# EAGLE board ihc_mon (EAGLE 7.7.0)
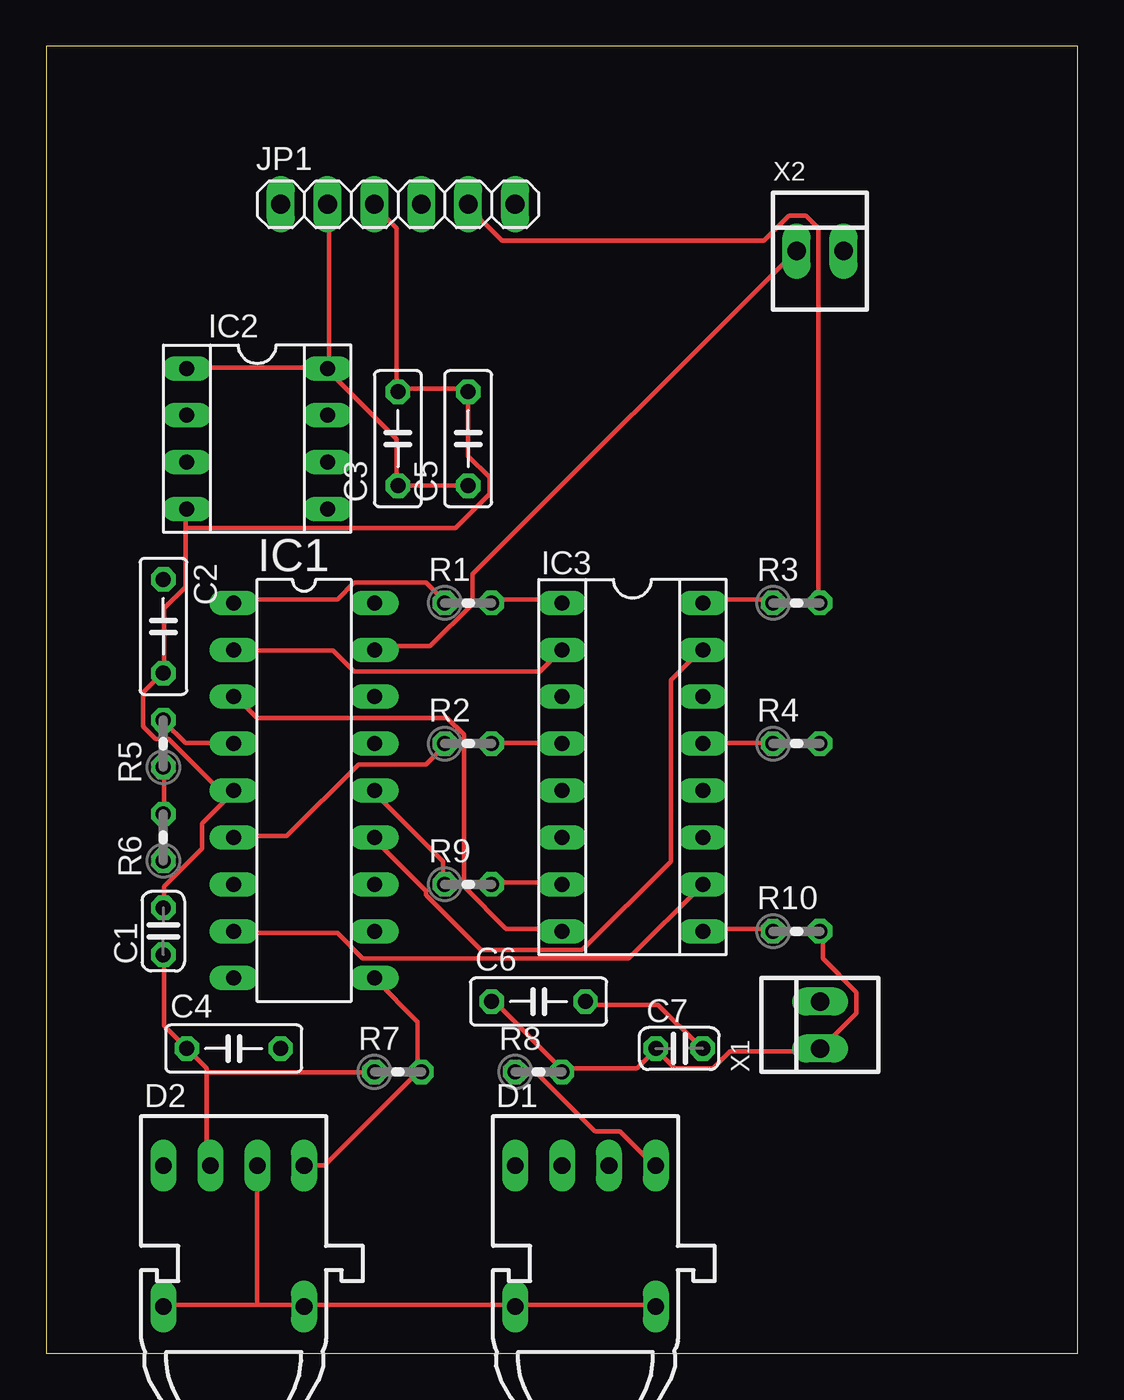
[diagram p0: board, top side]
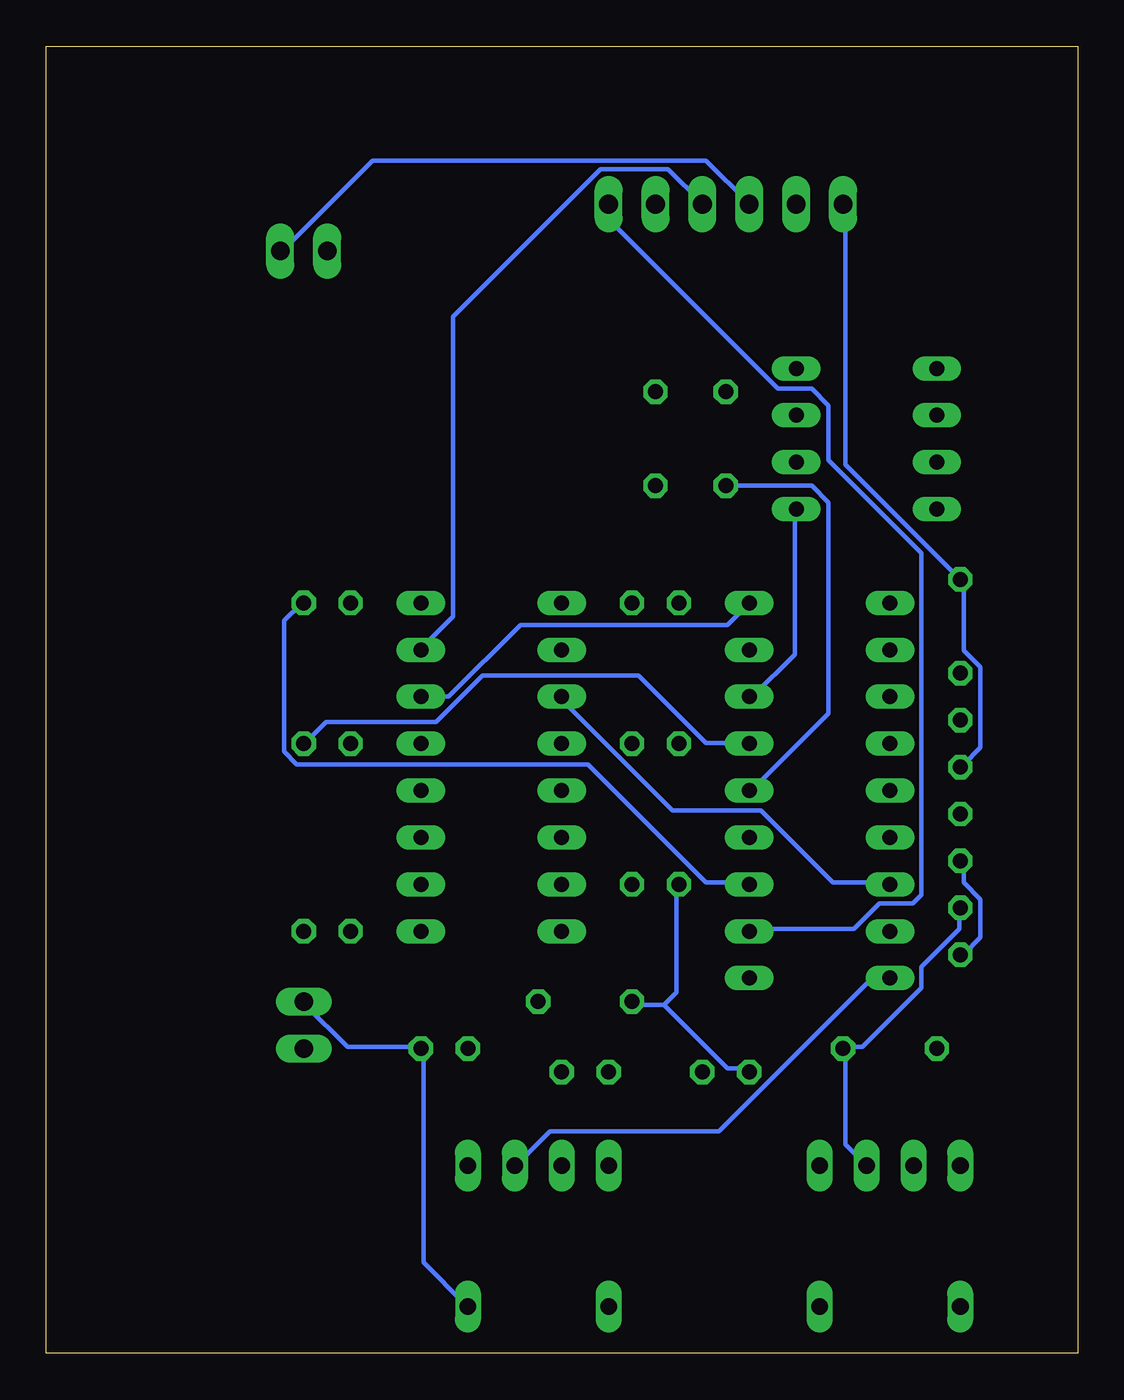
[diagram p1: board, bottom side, seen from below]

Size 55.86 x 70.79 mm. Coordinates in mm from the lower left corner, seen from the top.
Outline: 0,0 55.86,0 55.86,70.79 0,70.79 0,0
Copper layers (1*16): Top 0.035mm / dielectric 1.5mm / Bottom 0.035mm
Design rules "default": minimum track width 10mil, minimum drill 24mil, track to track 8mil, track to pad 8mil, pad to pad 8mil, via to via 8mil, smd to smd 8mil, copper to edge 40mil, drill to drill 8mil, minimum pad ring 10mil, minimum via ring 8mil, stop-mask expansion 4mil, vias tented up to drill 0mil, thermal gap 10mil

## Footprints (pad centres in the part's own frame; a part is rotated, then mirrored left to right if it is on the bottom)
C025-024X044 = drill 0.813 octagon: 1 -1.27,0; 2 1.27,0
C050-025X075 = drill 0.813 octagon: 1 -2.54,0; 2 2.54,0
HFBR25XX = drill 0.9 long: 1 0,3.81; 2 0,1.27; 3 0,-1.27; 4 0,-3.81; 5 7.62,-3.81; 8 7.62,3.81
DIL18 = drill 0.813 long: 1 -10.16,-3.81; 2 -7.62,-3.81; 3 -5.08,-3.81; 4 -2.54,-3.81; 5 0,-3.81; 6 2.54,-3.81; 7 5.08,-3.81; 8 7.62,-3.81; 9 10.16,-3.81; 10 10.16,3.81; 11 7.62,3.81; 12 5.08,3.81; 13 2.54,3.81; 14 0,3.81; 15 -2.54,3.81; 16 -5.08,3.81; 17 -7.62,3.81; 18 -10.16,3.81
SOCKET-08 = drill 0.813 long: 1 -3.81,-3.81; 2 -1.27,-3.81; 3 1.27,-3.81; 4 3.81,-3.81; 5 3.81,3.81; 6 1.27,3.81; 7 -1.27,3.81; 8 -3.81,3.81
SOCKET-16 = drill 0.813 long: 1 -8.89,-3.81; 2 -6.35,-3.81; 3 -3.81,-3.81; 4 -1.27,-3.81; 5 1.27,-3.81; 6 3.81,-3.81; 7 6.35,-3.81; 8 8.89,-3.81; 9 8.89,3.81; 10 6.35,3.81; 11 3.81,3.81; 12 1.27,3.81; 13 -1.27,3.81; 14 -3.81,3.81; 15 -6.35,3.81; 16 -8.89,3.81
1X06 = drill 1.016 long: 1 -6.35,0; 2 -3.81,0; 3 -1.27,0; 4 1.27,0; 5 3.81,0; 6 6.35,0
0204V = drill 0.813 octagon: 1 -1.27,0; 2 1.27,0
22-23-2021 = drill 1 long: 1 -1.27,0; 2 1.27,0

## Placement (x,y rotation side)
C1  22  [C025-024X044]  6.35,22.86 90 top
C2  0.1  [C050-025X075]  6.35,39.37 270 top
C3  0.1  [C050-025X075]  19.05,49.53 90 top
C4  0.1  [C050-025X075]  10.16,16.51 0 top
C5  0.1  [C050-025X075]  22.86,49.53 90 top
C6  0.1  [C050-025X075]  26.67,19.05 0 top
C7  22  [C025-024X044]  34.29,16.51 0 top
D1  HFBR1528  [HFBR25XX]  29.21,10.16 270 top
D2  HFBR2528  [HFBR25XX]  10.16,10.16 270 top
IC1  PIC18F1220P  [DIL18]  13.97,30.48 270 top
IC2  OX-52 10mhz  [SOCKET-08]  11.43,49.53 270 top
IC3  LX2885IGW  [SOCKET-16]  31.75,31.75 270 top
JP1  ICSP  [1X06]  19.05,62.23 0 top
R1  510  [0204V]  22.86,40.64 0 top
R2  510  [0204V]  22.86,33.02 0 top
R3  510  [0204V]  40.64,40.64 0 top
R4  510  [0204V]  40.64,33.02 0 top
R5  510  [0204V]  6.35,33.02 90 top
R6  10000  [0204V]  6.35,27.94 90 top
R7  2200  [0204V]  19.05,15.24 0 top
R8  100  [0204V]  26.67,15.24 0 top
R9  510  [0204V]  22.86,25.4 0 top
R10  510  [0204V]  40.64,22.86 0 top
X1  22-23-2021  [22-23-2021]  41.91,17.78 90 top
X2  22-23-2021  [22-23-2021]  41.91,59.69 0 top

## Library data of the parts
C1-C7 R1-R10 = resistor
D1 = opto-transmittter-hp; MF: AGILENT TECHNOLOGIES; MPN: HFBR-1528; OC_FARNELL: 1247638; OC_NEWARK: 06F6056
D2 = opto-transmittter-hp; MF: AGILENT TECHNOLOGIES; MPN: HFBR-2528; OC_FARNELL: 1247664; OC_NEWARK: 06F6096
IC1 = microchip; MF: MICROCHIP; MPN: PIC18F1220-I/P; OC_FARNELL: 9761977; OC_NEWARK: 92C2429
IC2 IC3 = ic-package
JP1 = pinhead
X1 X2 = con-molex; MF: MOLEX; MPN: 22-23-2021; OC_FARNELL: 1462926; OC_NEWARK: 25C3832

## Nets
N$1: IC3.1 R1.2
N$2: IC3.4 R2.2
N$3: IC3.16 R3.1
N$4: IC3.13 R4.1
N$5: IC1.4 R5.2
N$7: D2.1 IC1.10 R7.2
N$8: D1.1 R8.1
N$9: IC3.7 R9.2
N$10: IC1.17 X2.1
N$11: IC1.8 IC3.10
N$12: C2.1 JP1.1 R5.1 R6.2
N$14: D1.2 IC1.9
N$15: IC1.11 JP1.6
N$16: IC1.1 R1.1
N$17: IC1.2 IC3.2
N$18: IC1.6 R2.1
N$19: IC1.7 IC3.3
N$20: IC1.12 JP1.5 R3.2
N$21: IC1.13 IC3.15 JP1.4
N$22: IC1.15 R4.2
N$23: IC1.18 IC3.14
N$24: IC1.3 IC3.8
N$25: IC1.16 IC2.5
N$26: IC3.9 R10.1
VDD: C1.1 C3.1 C4.1 C5.1 C6.1 C7.1 D2.3 IC1.14 IC2.1 IC2.8 JP1.2 R6.1 R7.1 R8.2 R9.1 R10.2 X1.1
VSS: C1.2 C2.2 C3.2 C4.2 C5.2 C6.2 C7.2 D1.5 D1.8 D2.2 D2.5 D2.8 IC1.5 IC2.4 JP1.3 X1.2 X2.2

## Tracks (layer width: path | path; a pad name or v marks a point on that pad's centre or on a via)
N$1
  Top 0.254: R1.2 24.23,40.82 27.89,40.82 IC3.1
N$2
  Top 0.254: R2.2 24.23,33.05 27.89,33.05 IC3.4
N$3
  Top 0.254: IC3.16 35.66,40.82 39.32,40.82 R3.1
N$4
  Top 0.254: IC3.13 35.66,33.05 39.32,33.05 R4.1
N$5
  Top 0.254: IC1.4 10.06,33.05 7.54,33.05 6.4,34.19 R5.2
N$7
  Top 0.254: IC1.10 17.83,20.24 20.12,17.96 20.12,15.44 R7.2 20.12,15.21 15.09,10.18 14.17,10.18 D2.1
N$8
  Top 0.254: R8.1 25.6,15.21 26.52,15.21 29.72,12.01 31.09,12.01 32.92,10.18 D1.1
N$9
  Top 0.254: R9.2 24.23,25.5 27.89,25.5 IC3.7
N$10
  Top 0.254: IC1.17 17.83,38.3 20.8,38.3 23.09,40.59 23.09,42.19 40.46,59.56 X2.1
N$11
  Top 0.254: IC3.10 31.55,21.39 17.14,21.39 15.77,22.76 10.29,22.76 IC1.8
N$12
  Top 0.254: R6.2 6.4,29.39 6.4,31.67 R5.1
  Bottom 0.254: R5.1 6.17,31.9 5.26,32.82 5.26,37.16 6.17,38.08 6.17,41.73 C2.1 12.57,48.13 12.57,62.08 JP1.1
N$14
  Bottom 0.254: IC1.9 10.29,20.24 11.2,20.24 19.43,12.01 28.57,12.01 30.4,10.18 D1.2
N$15
  Bottom 0.254: IC1.11 17.6,22.99 12.12,22.99 10.74,24.36 8.91,24.36 8.46,24.82 8.46,43.33 13.49,48.36 13.49,51.33 14.4,52.25 16.23,52.25 25.38,61.39 25.38,62.08 JP1.6
N$16
  Top 0.254: IC1.1 10.29,40.82 15.77,40.82 16.69,41.73 20.57,41.73 21.49,40.82 R1.1
N$17
  Top 0.254: IC1.2 10.29,38.08 15.54,38.08 16.69,36.93 26.75,36.93 27.89,38.08 IC3.2
N$18
  Top 0.254: IC1.6 10.29,28.02 13.03,28.02 16.92,31.9 20.57,31.9 21.49,32.82 R2.1
N$19
  Bottom 0.254: IC1.7 10.29,25.5 13.26,25.5 17.14,29.39 21.95,29.39 28.12,35.56 IC3.3
N$20
  Top 0.254: JP1.5 22.86,62.08 24.69,60.25 38.86,60.25 40.23,61.62 41.15,61.62 41.83,60.94 41.83,40.82 R3.2
  Bottom 0.254: IC1.12 17.83,25.5 20.12,25.5 26.52,31.9 42.29,31.9 42.98,32.59 42.98,39.67 42.06,40.59 R3.2
N$21
  Top 0.254: IC1.13 17.83,27.79 20.57,25.04 20.57,24.82 23.55,21.84 29.03,21.84 33.83,26.64 33.83,36.47 35.43,38.08 IC3.15
  Bottom 0.254: JP1.4 20.34,62.31 22.17,64.14 25.83,64.14 33.83,56.13 33.83,39.9 35.43,38.3 IC3.15
N$22
  Bottom 0.254: IC1.15 17.83,33.05 20.12,33.05 23.77,36.7 32.23,36.7 34.75,34.19 40.69,34.19 41.83,33.05 R4.2
N$23
  Bottom 0.254: IC3.14 34.06,35.56 30.18,39.45 18.97,39.45 IC1.18
N$24
  Top 0.254: IC3.8 27.89,22.99 24.92,22.99 22.63,25.27 22.63,33.5 21.72,34.42 11.43,34.42 10.29,35.56 IC1.3
N$25
  Bottom 0.254: IC2.5 15.32,45.62 15.32,37.85 17.6,35.56 IC1.16
N$26
  Top 0.254: IC3.9 35.66,22.99 39.32,22.99 R10.1
VDD
  Top 0.254: C5.1 C3.1 18.97,46.99 18.97,49.5 15.32,53.16 IC2.8 | IC2.1 7.77,53.39 15.09,53.39 IC2.8 | JP1.2 15.32,62.08 15.32,53.39 IC2.8 | C1.1 6.4,21.39 6.4,17.73 C4.1 8.69,15.44 8.69,15.21 | 8.69,15.21 8.69,10.18 D2.3 | IC1.14 17.83,30.3 21.49,26.64 21.49,25.5 R9.1 | R10.2 42.06,22.76 42.06,21.39 43.89,19.56 43.89,18.41 42.06,16.59 X1.1 41.83,16.36 37.03,16.36 36.12,15.44 34.06,15.44 33.15,16.36 C7.1 32.92,16.36 32,15.44 28.12,15.44 R8.2 27.89,15.44 24.23,19.1 C6.1 | 8.69,15.21 17.6,15.21 R7.1
  Bottom 0.254: R6.1 6.17,26.64 6.17,25.5 5.26,24.59 5.26,22.53 6.17,21.61 C1.1 | 22.4,18.87 18.97,15.44 17.83,15.44 R7.1 | 22.4,18.87 24,18.87 C6.1 | 22.4,18.87 21.72,19.56 21.72,25.27 R9.1 | C3.1 14.4,46.99 13.49,46.08 13.49,34.65 17.6,30.53 IC1.14
VSS
  Top 0.254: JP1.3 17.83,62.08 18.97,60.94 18.97,52.25 C3.2 19.2,52.25 22.86,52.25 C5.2 22.86,48.59 24,47.45 24,46.53 22.17,44.7 7.54,44.7 | 9.83,30.07 10.06,30.3 IC1.5 9.83,30.07 | 9.83,30.07 8.46,28.7 8.46,27.33 6.4,25.27 6.4,24.13 C1.2 | 7.54,44.7 7.54,45.62 IC2.4 | 7.54,44.7 7.54,41.5 6.4,40.36 6.4,36.93 C2.2 6.17,36.7 5.26,35.79 5.26,33.96 5.94,33.27 6.63,33.27 9.83,30.07 | C6.2 29.26,18.87 33.15,18.87 35.43,16.59 C7.2 | D1.8 32.92,2.64 25.6,2.64 D1.5 25.38,2.64 14.17,2.64 D2.8 13.95,2.64 11.43,2.64 | 11.43,2.64 6.4,2.64 D2.5 | 11.43,2.64 D2.2
  Bottom 0.254: X2.2 42.98,59.79 38.18,64.59 20.12,64.59 17.83,62.31 JP1.3 | X1.2 41.83,18.87 39.55,16.59 35.66,16.59 C7.2 35.43,16.36 35.43,4.93 33.15,2.64 D1.8 | D2.2 11.43,10.18 12.57,11.33 12.57,16.36 C4.2 12.57,16.59 11.66,16.59 8.46,19.79 8.46,20.93 6.4,22.99 6.4,24.13 C1.2